# Altium PCB HeatingAC_Garage.PcbDoc
Units mil, origin at the board's own origin, x right, y up, seen from the top; angles counter-clockwise.
Board outline 6000 x 6000 mil, 4 copper layers (Top Layer, Internal Plane 1, Internal Plane 2, Bottom Layer); 61 components, 55 nets, 190 pads, 20 vias.
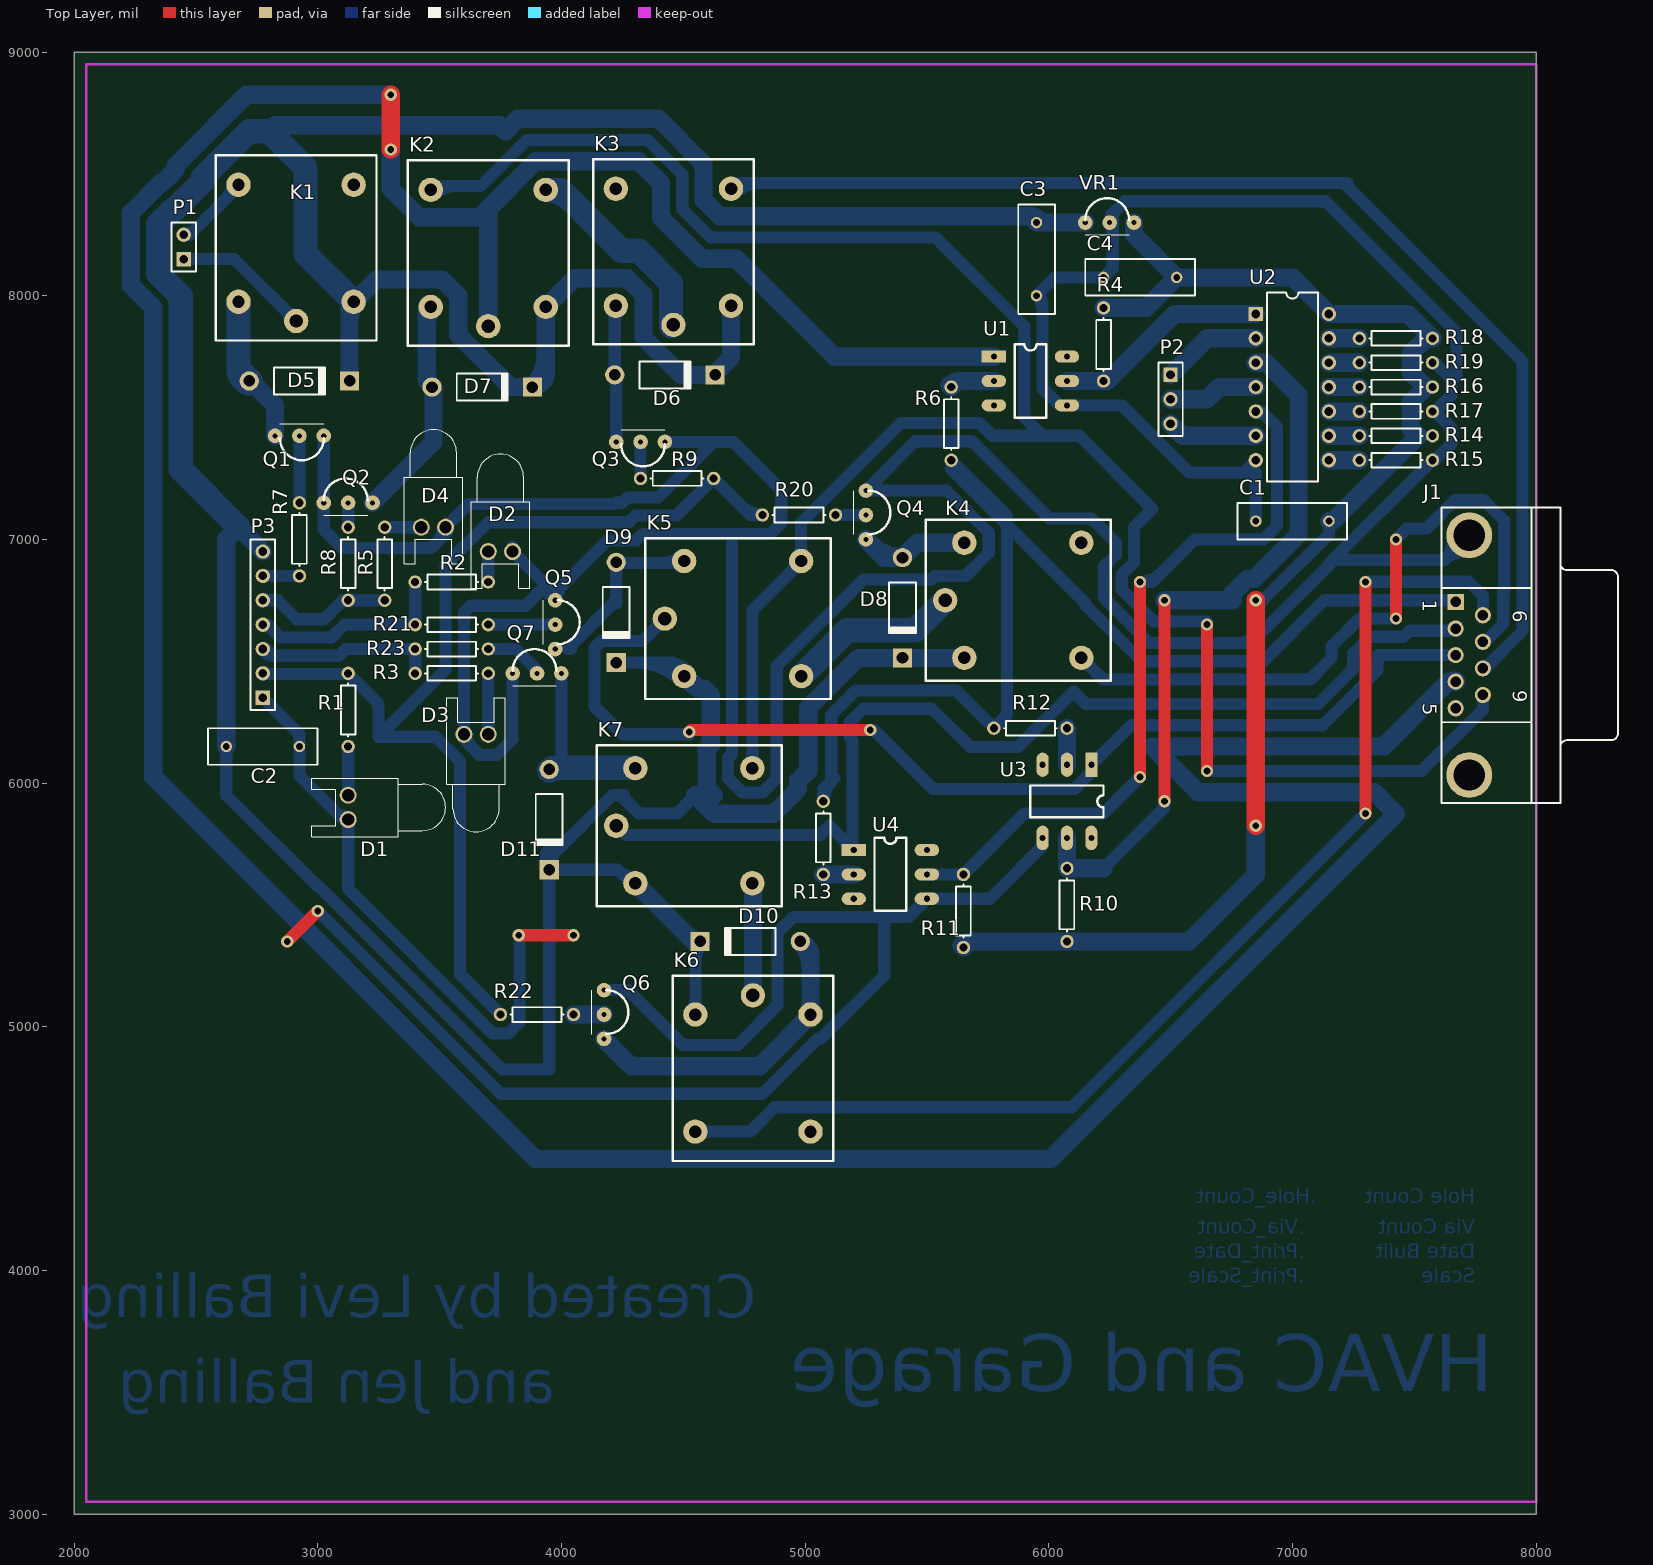
[diagram p0: Top Layer view]
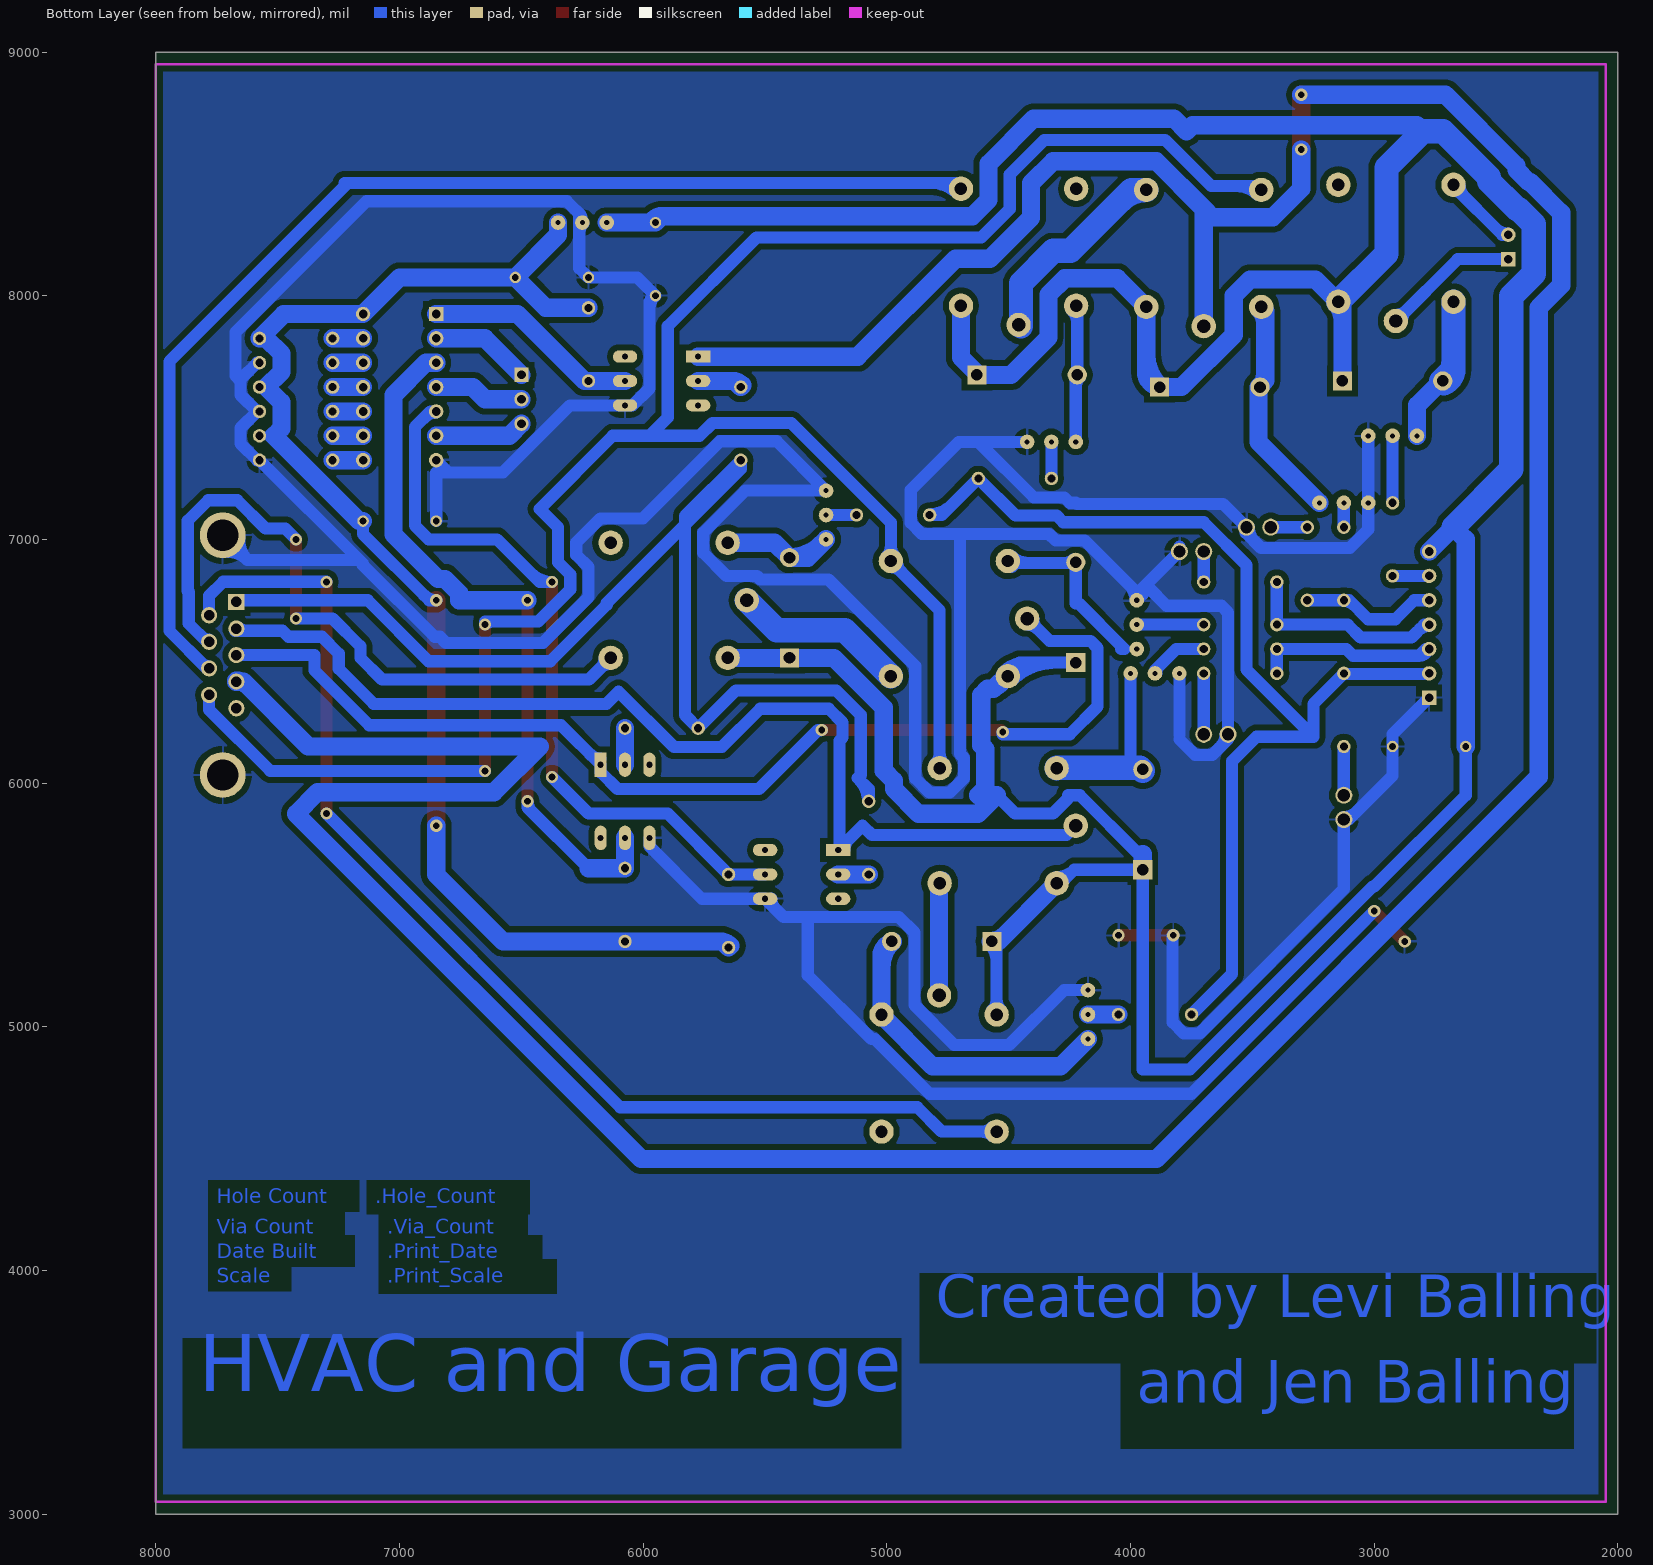
[diagram p1: Bottom Layer view, seen from below]
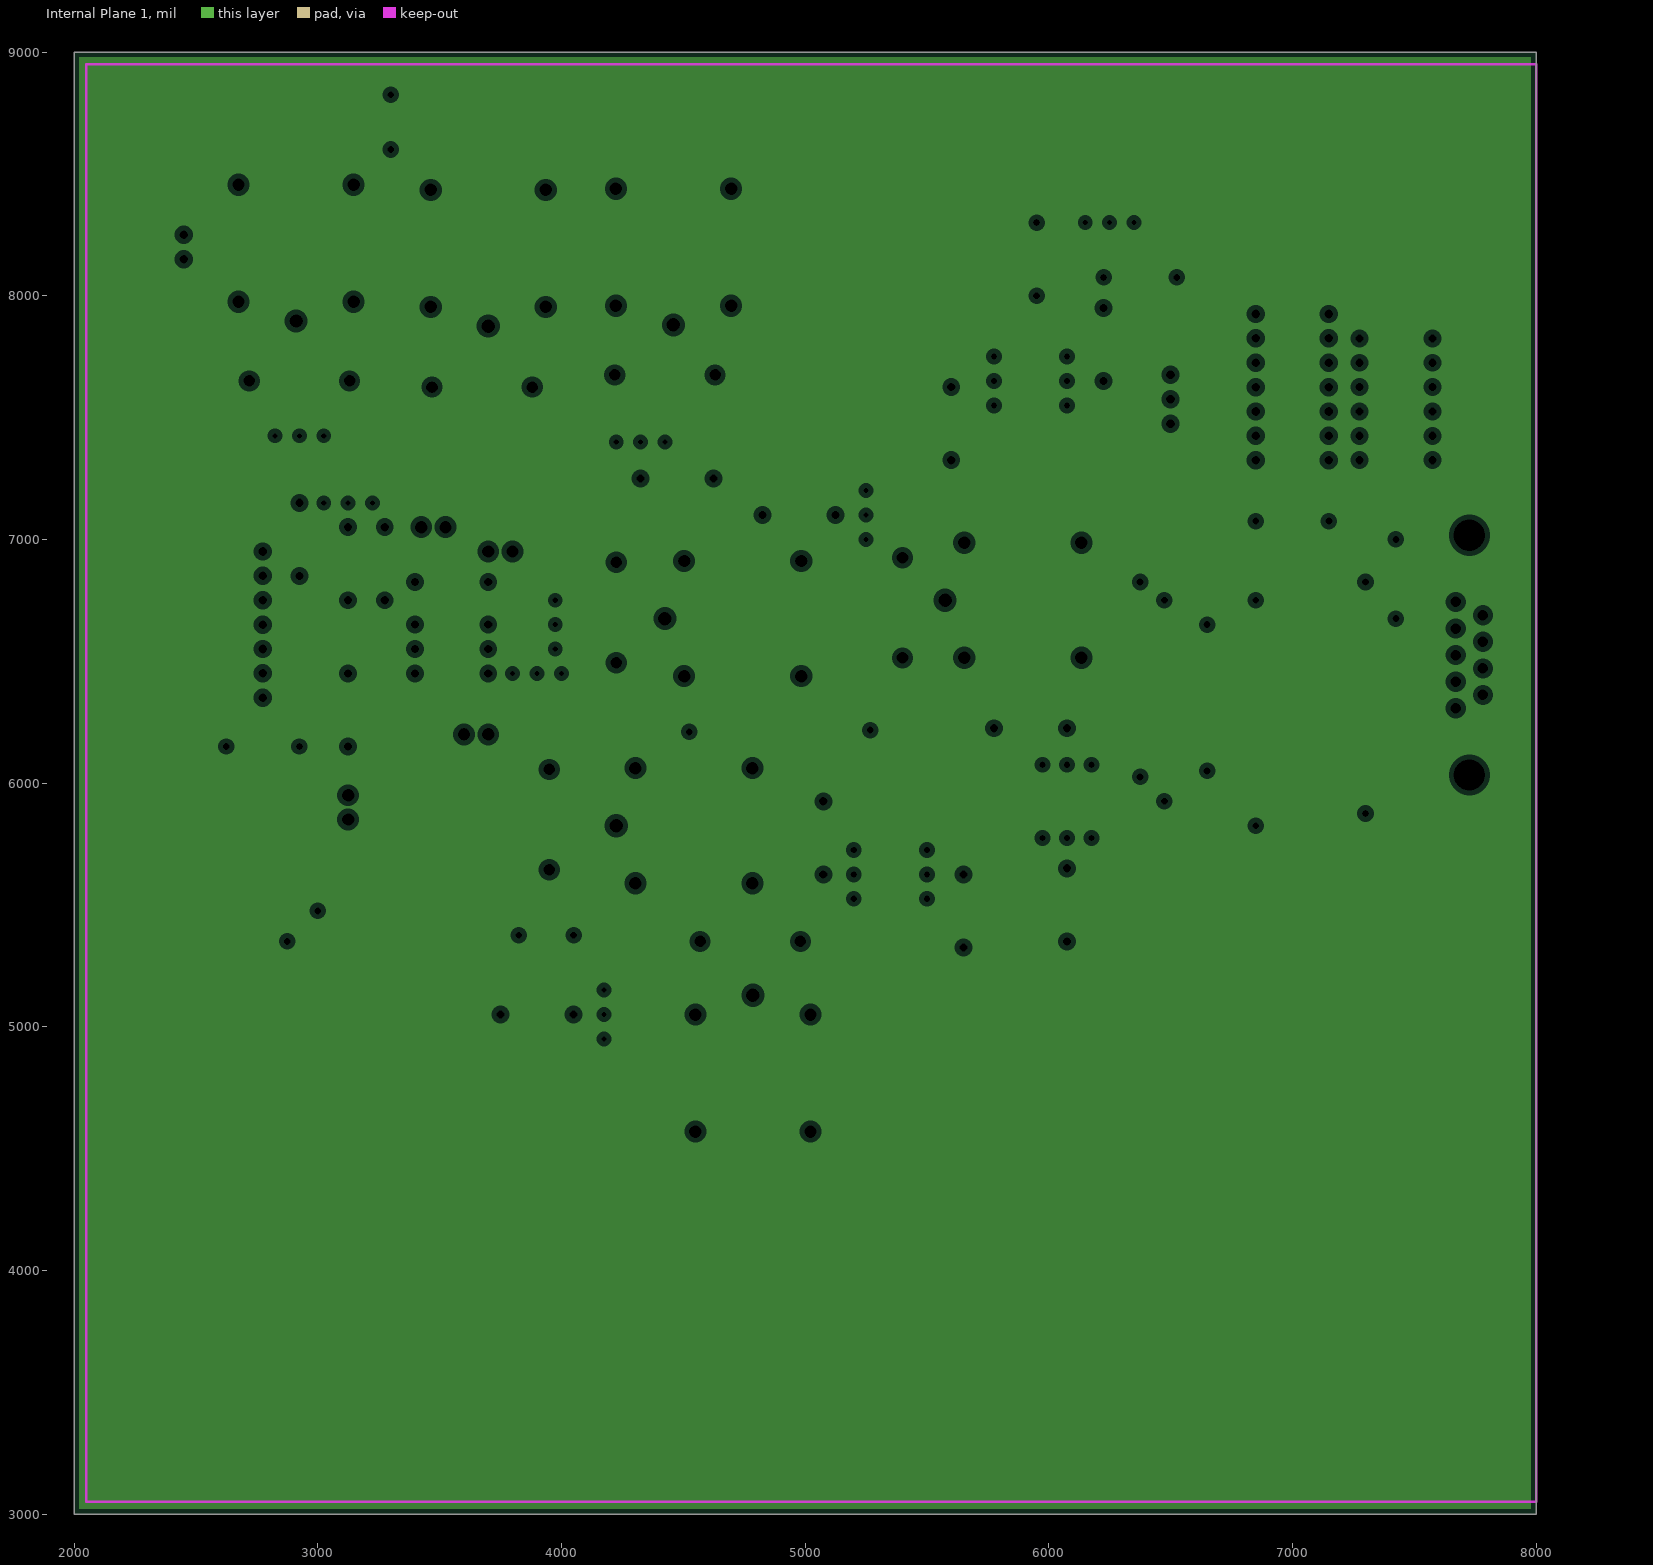
[diagram p2: Internal Plane 1, clearances drawn from the general rule]
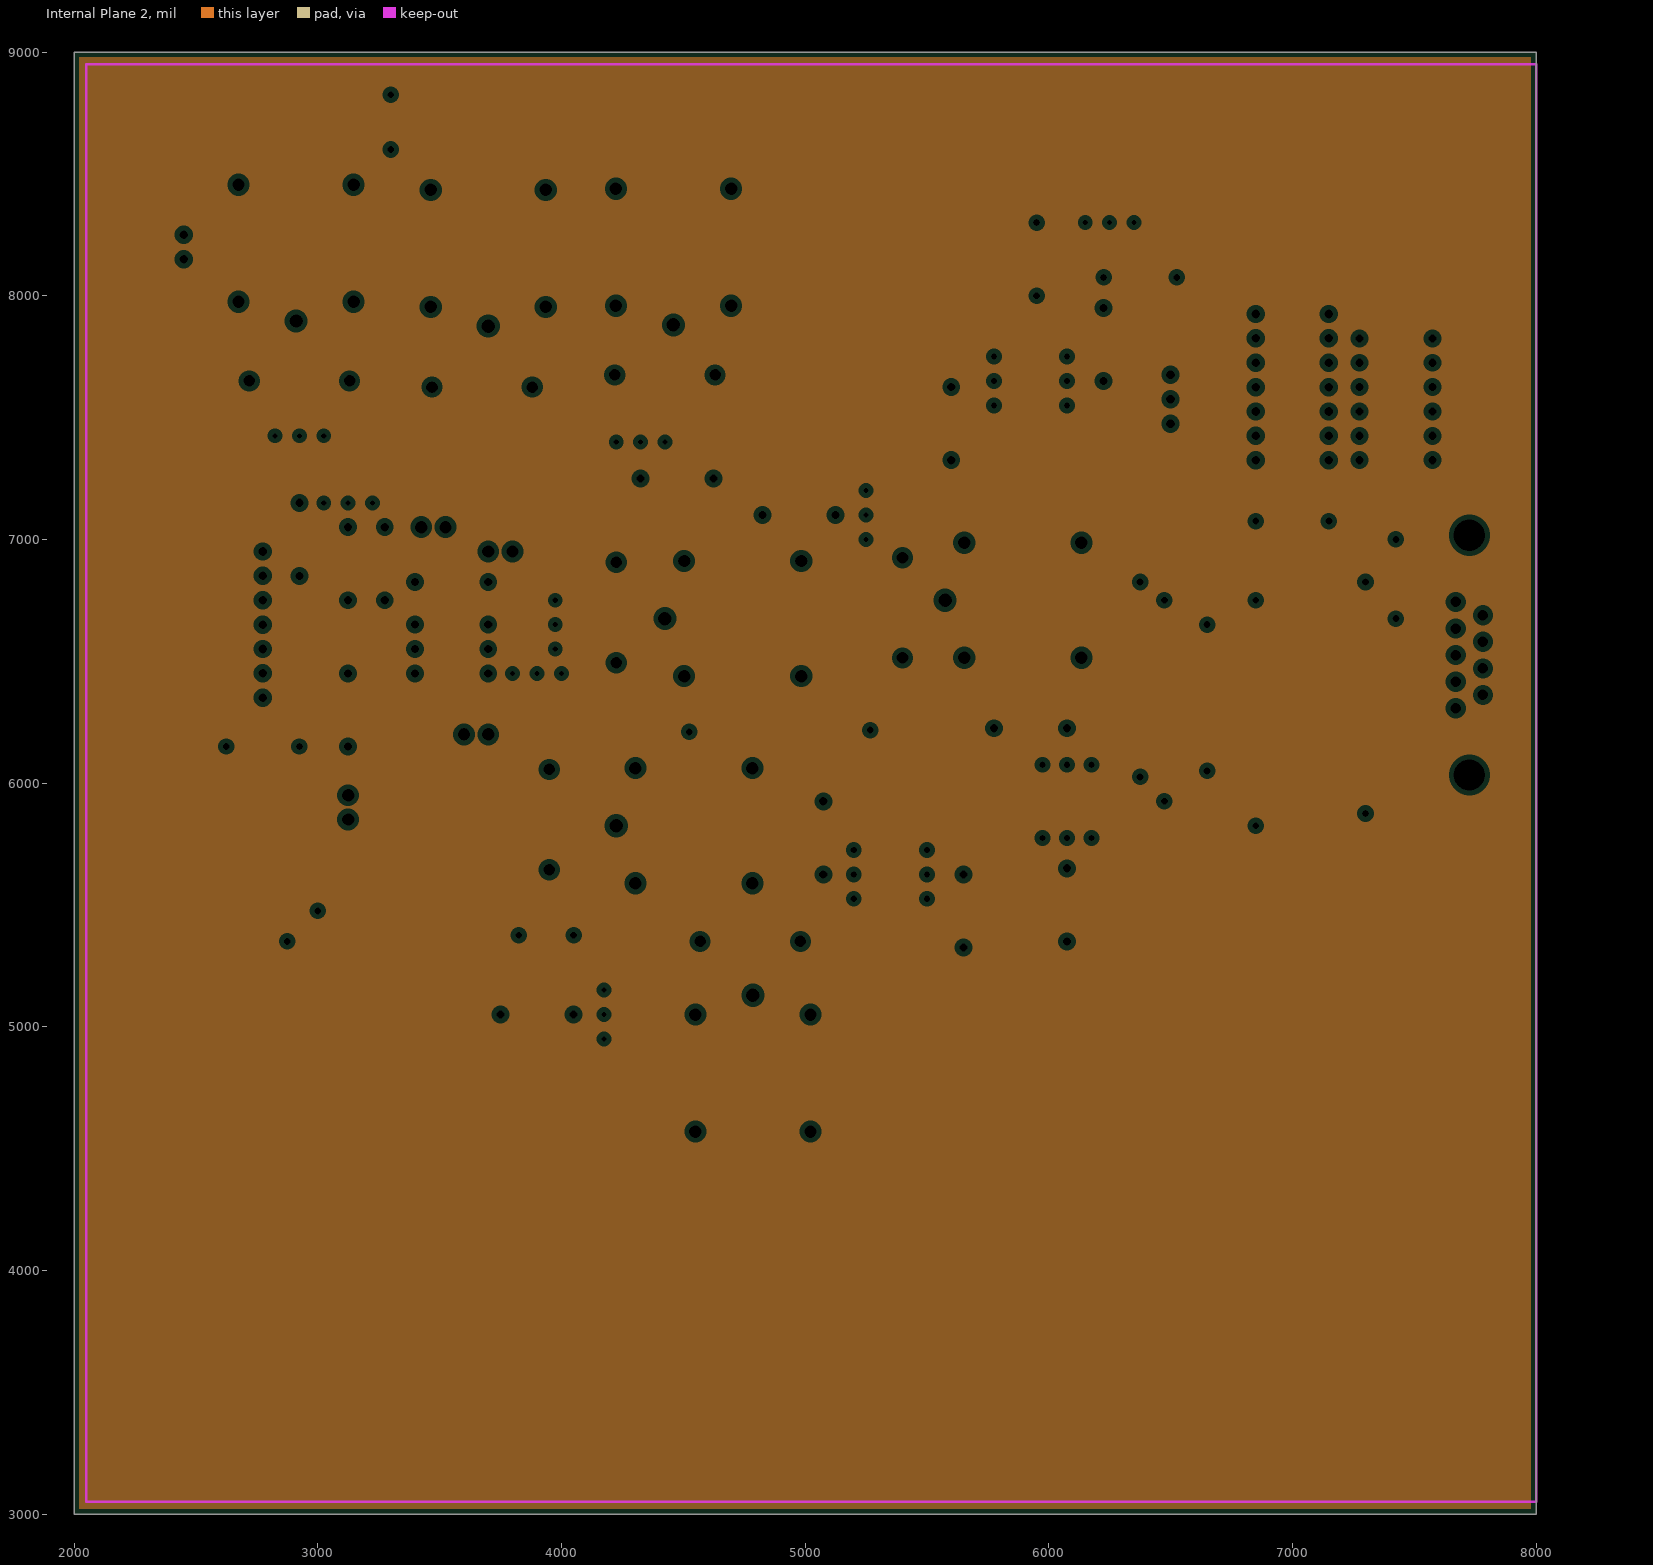
[diagram p3: Internal Plane 2, clearances drawn from the general rule]

## Layer stack, top to bottom
Top Layer: signal copper 1.4
Dielectric: dielectric 12.6, FR-4, Dk 4.8
Internal Plane 1: plane copper 1.4
Dielectric: dielectric 12.6, FR-4, Dk 4.8
Internal Plane 2: plane copper 1.4
Dielectric: dielectric 12.6, FR-4, Dk 4.8
Bottom Layer: signal copper 1.4

## Board outline
2000,3000 8000,3000 8000,9000 2000,9000

## Design rules (kind name [scope] priority, off if disabled: settings)
Clearance [All] p1: gap=25
PlaneClearance [All] p1: clearance=20
PlaneConnect [All] p1: planeconnectstyle=Relief reliefexpansion=20 reliefentries=4 reliefconductorwidth=10 reliefairgap=10
PolygonConnect [All] p1: connectstyle=Relief reliefconductorwidth=10 reliefentries=4 polygonreliefangle="90 Angle"
RoomDefinition HeatingAC_Garage [InComponentClass('HeatingAC_Garage')] p1: confinementstyle=ConfineIn formatcopy=TRUE lockcomponents=FALSE outline 2025,3050 8000,3050 8000,8950 2025,8950
RoutingVias [All] p1: holewidth=32 width=62 viastyle="Through Hole" minholewidth=28 minwidth=50 maxholewidth=28 maxwidth=50
SilkscreenOverComponentPads [All] p1: minsilkscreentomaskgap=10
SolderMaskExpansion [All] p1: expansion=4
Width [All] p1: maxlimit=100 minlimit=5 preferedwidth=25 bottomlayer_minwidth=25 minimp=50.000000 maximp=50.000000 favimp=50.000000
25 further rules are at their usual default settings.

## Classes and differential pairs
component class HeatingAC_Garage: *1 *2 *3 C1 C2 C3 C4 D1 D2 D3 D4 D5 D6 D7 D8 D9 D10 D11 J1 K1 K2 K3 K4 K5 K6 K7 P1 P2 P3 Q1 Q2 Q3 Q4 Q6 R1 R2 R3 R5 R8 R9 R11 R12 R14 R15 R16 R17 R20 R21 R22 R23 U1 U2 U3 U4 VR1

## Components (designator, comment, footprint, x,y, rotation, side; value= is the part's Value field where it differs from the comment)
C1 "Cap" RAD-0.3 7000,7075 r0 top
C2 "Cap" RAD-0.3 2775,6150 r180 top
C3 "Cap" RAD-0.3 5950,8150 r90 top
C4 "Cap" RAD-0.3 6375,8075 r0 top
D1 "LED_White" LED-0 3125,5900 r90 top
D2 "LED_White" LED-0 3750,6950 r180 top
D3 "LED_White" LED-0 3650,6200 r0 top
D4 "LED_White" LED-0 3475,7050 r180 top
D5 "1N4001" DO-41 2925,7650 r0 top
D6 "1N4001" DO-41 4425,7675 r0 top
D7 "1N4001" DO-41 3675,7625 r0 top
D8 "1N4001" DO-41 5400,6719.09 r270 top
D9 "1N4001" DO-41 4225,6700 r270 top
D10 "1N4001" DO-41 4775,5350 r180 top
D11 "1N4001" DO-41 3950,5850 r270 top
J1 "D Connector 9" DSUB1.385-2H9 8100,6525 r270 top
K1 "SPDT" "Relay  SPDT Tayda" 2911.22,7896.26 r180 top
K2 "SPDT" "Relay  SPDT Tayda" 3700,7875 r180 top
K3 "SPDT" "Relay  SPDT Tayda" 4460,7880 r180 top
K4 "SPDT" "Relay  SPDT Tayda" 5575,6750 r90 top
K5 "SPDT" "Relay  SPDT Tayda" 4425,6675 r90 top
K6 "SPDT" "Relay  SPDT Tayda" 4786.22,5128.74 r0 top
K7 "SPDT" "Relay  SPDT Tayda" 4225,5825 r90 top
P1 "Header 2" HDR1X2 2450,8150 r90 top
P2 "Header 3" HDR1X3 6500,7675 r270 top
P3 "Header 7" HDR1X7 2775,6350 r90 top
Q1 "2N3904" 2N3904 3025,7425 r180 top
Q2 "2N3904" 2N3904 3025,7150 r0 top
Q3 "2N3904" 2N3904 4425,7400 r180 top
Q4 "2N3904" 2N3904 5250,7200 r270 top
Q5 "2N3904" 2N3904 3975,6750 r270 top
Q6 "2N3904" 2N3904 4175,5150 r270 top
Q7 "2N3904" 2N3904 3800,6450 r0 top
R1 "Res1" AXIAL-0.3 3125,6300 r270 top
R2 "Res1" AXIAL-0.3 3550,6825 r0 top
R3 "Res1" AXIAL-0.3 3550,6450 r0 top
R4 "Res1" AXIAL-0.3 6225,7800 r90 top
R5 "Res1" AXIAL-0.3 3275,6900 r90 top
R6 "Res1" AXIAL-0.3 5600,7475 r90 top
R7 "Res1" AXIAL-0.3 2925,7000 r90 top
R8 "Res1" AXIAL-0.3 3125,6900 r90 top
R9 "Res1" AXIAL-0.3 4475,7250 r180 top
R10 "Res1" AXIAL-0.3 6075,5500 r270 top
R11 "Res1" AXIAL-0.3 5650,5475 r270 top
R12 "Res1" AXIAL-0.3 5925,6225 r0 top
R13 "Res1" AXIAL-0.3 5075,5775 r270 top
R14 "Res1" AXIAL-0.3 7425,7425 r180 top
R15 "Res1" AXIAL-0.3 7425,7325 r0 top
R16 "Res1" AXIAL-0.3 7425,7625 r180 top
R17 "Res1" AXIAL-0.3 7425,7525 r0 top
R18 "Res1" AXIAL-0.3 7425,7825 r180 top
R19 "Res1" AXIAL-0.3 7425,7725 r0 top
R20 "Res1" AXIAL-0.3 4975,7100 r0 top
R21 "Res1" AXIAL-0.3 3550,6650 r0 top
R22 "Res1" AXIAL-0.3 3900,5050 r0 top
R23 "Res1" AXIAL-0.3 3550,6550 r0 top
U1 "OptoCoupler" Octocoupler 5775,7750 r0 top
U2 "SN7416N" N014 7000,7625 r270 top
U3 "OptoCoupler" Octocoupler 6175,6075 r270 top
U4 "OptoCoupler" Octocoupler 5200,5725 r0 top
VR1 "L78L05ACZ" 2N3904 6150,8300 r0 top

## Footprints (in the part's own frame and the unit in brackets; to place one, negate y for a bottom-side part, rotate by r counter-clockwise, add the part's x,y. Pads: shape width x height; smd on the part's side, far side on the other; paste and mask are expansions set on the pad)
2N3904 [mil] "simple transistor, but bigger holes and pads"
  round 60 hole 21: 1(0,0) 2(100,0) 3(200,0)
  silkscreen extent 0,-50 180,100
AXIAL-0.3 [mm] "Axial Device, Thru-Hole; 2 Leads; 0.3 in Pin Spacing"
  round 1.4 hole 0.85: 1(-3.81,0) 2(3.81,0)
  silkscreen extent -2.77,-0.76 2.77,0.76
DO-41 [mm] "Diode, Axial; Body 5.2 x 2.7 mm (LxDia. max), Lead Dia. 0.86 mm (max)"
  round 2 hole 1.2: 1(-5.23,0)
  rect 2x2 hole 1.2: 2(5.23,0)
  silkscreen extent -2.65,-1.4 2.75,1.4
DSUB1.385-2H9 [mm] "Connector; D Subminiature; 9 Position; Right Angle; Pitch 1.385 mm"
  rect 1.69x1.69 hole 1.09: 1(-5.54,-10.92)
  round 1.69 hole 1.09: 2(-2.77,-10.92) 3(0,-10.92) 4(2.77,-10.92) 5(5.54,-10.92) 6(-4.155,-8.08) 7(-1.385,-8.08) 8(1.385,-8.08) 9(4.155,-8.08)
  round 4.76 hole 3.26: 10(-12.495,-9.5) 11(12.495,-9.5)
  silkscreen extent -15.4,-12.4 15.4,6
HDR1X2 [mm] "Connector; Header; 2 Position"
  rect 1.5x1.5 hole 0.9: 1(0,0)
  round 1.5 hole 0.9: 2(2.54,0)
  silkscreen extent -1.27,-1.27 3.81,1.27
HDR1X3 [mm] "Connector; Header; 3 Position"
  rect 1.5x1.5 hole 0.9: 1(0,0)
  round 1.5 hole 0.9: 2(2.54,0) 3(5.08,0)
  silkscreen extent -1.27,-1.27 6.35,1.27
HDR1X7 [mm] "Connector; Header; 7 Position"
  rect 1.5x1.5 hole 0.9: 1(0,0)
  round 1.5 hole 0.9: 2(2.54,0) 3(5.08,0) 4(7.62,0) 5(10.16,0) 6(12.7,0) 7(15.24,0)
  silkscreen extent -1.27,-1.27 16.51,1.27
LED-0 [mil] "LED; 2 Leads"
  round 70 hole 50: 1(50,0) 2(-50,0)
  silkscreen extent -120,-400 120,150
N014 [mm] "DIP; 14 Leads; Row Spacing 7.62 mm; Pitch 2.54 mm"
  rect 1.5x1.5 hole 0.9: 1(-7.62,-3.81)
  round 1.5 hole 0.9: 2(-5.08,-3.81) 3(-2.54,-3.81) 4(0,-3.81) 5(2.54,-3.81) 6(5.08,-3.81) 7(7.62,-3.81) 8(7.62,3.81) 9(5.08,3.81) 10(2.54,3.81) 11(0,3.81) 12(-2.54,3.81) 13(-5.08,3.81) 14(-7.62,3.81)
  silkscreen extent -9.85,-2.65 9.85,2.65
Octocoupler [mil]
  rect 100x50 hole 25: 1(0,0)
  oval 100x50 hole 25: 2(0,-100) 3(0,-200) 4(300,-200) 5(300,-100) 6(300,0)
  silkscreen extent 85,-250 215,50
RAD-0.3 [mm] "Radial Cap, Thru-Hole; 2 Leads; 0.3 in Pin Spacing"
  round 1.2 hole 0.7: 1(-3.81,0) 2(3.81,0)
  silkscreen extent -5.71,-1.91 5.71,1.91
"Relay  SPDT Tayda" [mm] "this is the ATTC-3372"
  round 2.54 hole 1.4: 0(0,0)
  round 2.54 hole 1.3: 1(6,-2) 2(-6,-2) 3(6,-14.2) 4(-6,-14.2)
  silkscreen extent -8.38,-17.27 8.38,2.03

## Part data
C1 C2 C3 C4: "Capacitor"
D1 D2 D3 D4: library part LED0, "Typical INFRARED GaAs LED"
D5 D6 D7 D8 D9 D10 D11: "1.0 Ampere General Purpose Rectifier"
J1: "Receptacle Assembly, 9 Position, Right Angle"
P1: "Header, 2-Pin"
P2: "Header, 3-Pin"
P3: "Header, 7-Pin"
Q1 Q2 Q3 Q4 Q5 Q6 Q7: "NPN General Purpose Amplifier"
R1 R2 R3 R4 R5 R6 R7 R8 R9 R10 R11 R12 R13 R14 R15 R16 R17 R18 R19 R20 R21 R22 R23: "Resistor"
U2: "Hex Inverter Buffer / Driver with High-Voltage Outputs"
VR1: library part "Volt Reg", "Voltage Regulator"

## Via types
v1: diameter 50, hole 28, Top Layer to Bottom Layer, 20 vias

## Nets (pads, with @x,y where several pads share a name; then routed paths per layer and width w, separated by ;. In a path a pad name is that pad's centre, name@x,y a point inside that pad or via, vN(x,y) a via of type N, cw(c..) or ccw(c..) an arc to the next point about the centre after c; other vN are vias at no path point)
24VAC_GND: J1.1 R6.1 R12.1 R13.1 | length 5120.8
  Bottom Layer w50: R13.1 5075,5975 5120.13,6020.13 5107.63,6032.63 5107.63,6279.51 5207.99,6379.87 5620.13,6379.87 R12.1 5828.74,6278.74 5828.74,7096.26 R6.1 5600,7289.12 6150,6739.12 6150,6731.8 6381.8,6500 6881.07,6500 7131.07,6750 J1.1@7675,6750 ; R13.1@5077.56,5925 cw(c5204.45,5925) 5114.72,6014.72 ; R6.1@5602.56,7325 ccw(c5695.35,7325) 5629.74,7259.39 ; 7633.49,6750 cw(c7633.49,6706.52) J1.1@7664.23,6737.26
+VCC5: C1.2 C4.2 R4.2 R10.2 R11.2 R14.1 R16.1 R18.1 U2.14 VR1.3 | length 5850.1
  Top Layer w75: v1(6850,5825) v1(6850,6750)
  Bottom Layer w50: 6898.74,6770.19 cw(c6850,6818.93) v1(6850,6750) 6878.55,6750 7150,7021.45 C1.2
  Bottom Layer w75: R11.2@5642.97,5332.03 cw(c5686.36,5288.64) 5686.36,5350 ; R11.2 5675,5350 R10.2 6575,5350 6850,5625 v1(6850,5825) ; R4.2 6400,7950 C4.2 ; VR1.3 6350,8250 C4.2 ; C1.2 7166.42,7075 7516.42,7425 7484.94,7456.48 7484.94,7562.3 7547.64,7625 7484.94,7687.7 7484.94,7762.3 7547.64,7825 R18.1 7475,7925 U2.14 7000,8075 C4.2
+VCC12: C2.2 C3.2 D5.2 D6.2 D7.2 D8.2 D9.2 D10.2 D11.2 K1.2 K2.2 K3.2 K4.2 K5.2 K6.2 K7.2 P3.7 VR1.1 | length 18883.3
  Bottom Layer w50: C2.2 2625,5950 3000,5575 3006.07,5575 3756.07,4825 3950,4825 D11.2 4230.91,5644.09 K7.2@4300,5575 ; 3950,5709.1 3967.68,5709.1 4208.58,5950 4255.86,5950 ; D9.2 4455.91,6494.09 ; 4231.15,5643.85 ccw(c4303.74,5716.43) K7.2@4303.74,5613.78 ; 4257.14,5948.72 4257.14,5936.79 4318.93,5875 4475,5875 4548.72,5948.72 ; 4309.84,6494.09 cw(c4309.84,6244.88) K5.2@4486.06,6421.1 ; 4430.55,6494.09 cw(c4430.55,6365.59) K5.2@4521.42,6456.46 ; K5.2@4478.74,6438.83 ccw(c4400.79,6438.97) 4455.91,6494.09 ; K5.2@4500,6450 4455.91,6494.09 ; K6.2@4532.32,5067.68 ccw(c4489.64,5110.36) 4550,5110.36 ccw(c4610.36,5110.36) K6.2@4567.68,5067.68 ; K6.2 D10.2@4550,5325 ; 4550,5269.21 cw(c4649.89,5269.21) D10.2@4579.26,5339.84
  Bottom Layer w75: C2.2 2625,7000 2675,7050 P3.7 ; 2800,8675 2825,8700 3745.58,8700 3770.58,8675 3822.13,8726.56 4398.44,8726.56 4583.72,8541.28 4583.72,8392.46 4649.62,8326.56 5923.44,8326.56 ; D5.2 3130.91,7955.91 3241.24,8066.24 3510.38,8066.24 3576.28,8000.34 3576.28,7839.62 3790.9,7625 D7.2@3875,7625 ; 3130.91,7904.9 cw(c3217.54,7904.9) K1.2@3156.28,7966.16 ; D7.2@3879.58,7626.32 ccw(c3742.85,7763.06) 3936.22,7763.06 ; D7.2@3880.78,7626.87 ccw(c3876.73,7686.22) 3936.22,7686.22 ; D7.2 D7.2@3875,7625 ; D11.2 3950,5709.1 ; K7.2 4542.52,5350 D10.2 D10.2@4575,5350 ; K5.2@4500,6450 4562.5,6387.5 4586.24,6387.5 ; K5.2@4515.84,6441.93 ccw(c4586.24,6460.25) 4586.24,6387.5 ; 4520.54,5371.98 ccw(c4569.09,5420.54) D10.2@4569.09,5351.87 ; 4548.72,5948.72 4550,5950 4626.28,5873.72 4869.9,5873.72 4971.56,5975.37 4971.56,6009.03 5012.97,6050.44 5012.97,6308.59 5217.56,6513.19 D8.2 5638.19,6513.19 K4.2@5650,6525 ; 4625,5950 4596.56,5978.44 4596.56,6138.89 4612.5,6154.83 4612.5,6361.24 4586.24,6387.5 ; K3.2 4696.22,7746.22 4625,7675 4490.9,7675 4337.5,7828.4 4337.5,8004.12 4270.38,8071.24 4053.72,8071.24 K2.2 3936.22,7686.22 ; 5919.39,8326.56 cw(c5919.39,8269.39) C3.2@5959.81,8309.81 ; C3.2@5960.79,8308.73 ccw(c5923.45,8278.53) 5923.45,8326.56 ; VR1.1 C3.2 5923.44,8326.56 ; D7.2@3875,7625 3936.22,7686.22
  Bottom Layer w100: 2675,7050 2437.5,7287.5 2437.5,7997.38 2345.47,8089.41 2345.47,8293.3 2406.7,8354.53 2413.63,8354.53 2529.28,8470.18 2529.28,8486.37 2717.91,8675 2800,8675 2950,8525 2950,8172.44 K1.2
AC_G_LINE_IN: J1.4 K2.0 U1.1 | length 16384.6
  Top Layer w75: v1(3300,8600) v1(3300,8825)
  Bottom Layer w75: v1(3300,8600) 3300,8438.74 3417.18,8321.56 3664.62,8321.56 3700,8356.93 ; v1(3300,8825) 2708.81,8825 2416.78,8532.97 2416.78,8516.78 2367.03,8467.03 2360.1,8467.03 2232.97,8339.9 2232.97,8042.81 2325,7950.78 2325,6026.26 3894.07,4457.19 6008.44,4457.19 7425,5873.74 7336.24,5962.5 6612.5,5962.5 6425,6150 7375,6150 7640.94,6415.94 J1.4 ; K2.0 3700,8356.93 ; U1.1 5120.11,7750 4718.56,8151.56 4577.13,8151.56 4408.72,8319.97 4408.72,8461.39 4318.56,8551.56 3894.62,8551.56 3700,8356.93 ; 7627.57,6402.57 cw(c7670.08,6360.06) J1.4@7670.08,6420.18
AC_G_LINE_OUT: J1.8 K3.4 | length 5043.9
  Bottom Layer w50: K3.4 4719.67,8462.5 7225,8462.5 7225,8450 7945,7730 7945,6624.88 7790.59,6470.47 J1.8 ; K3.4@4713.9,8421.38 cw(c4813.18,8322.1) 4813.18,8462.5 ; J1.8@7781.89,6478.74 ccw(c7781.89,6519.71) 7810.86,6490.74
AC_W_LINE_IN: J1.3 K5.0 U3.1 | length 4749.2
  Top Layer w50: v1(4525,6209.75) 4532.63,6217.37 v1(5267.37,6217.37)
  Bottom Layer w50: K5.0@4400,6675 cw(c4339.64,6675) 4382.32,6632.32 cw(c4425,6589.64) K5.0@4425,6650 ; K5.0 4333.46,6583.46 4164.92,6583.46 4135.63,6554.18 4135.63,6314.37 4250,6200 v1@4525,6200 ; 4501.46,6200 ccw(c4501.46,6233.29) v1(4525,6209.75) ; 5293.41,6206.59 ccw(c5267.37,6180.56) v1(5267.37,6217.37) 5282.63,6217.37 5525,5975 6106.07,5975 6175,6043.93 U3.1 6337.5,6237.5 7124.63,6237.5 7350,6462.87 7350,6525 J1.3@7675,6525 ; U3.1@6175,6100 ccw(c6175,6160.36) 6217.68,6117.68
AC_W_LINE_OUT: J1.7 K4.4 | length 2995.5
  Top Layer w50: v1(7425,6675) v1(7425,7000)
  Bottom Layer w50: K4.4@6134.06,6488.78 cw(c6134.06,6428.42) 6176.73,6471.1 cw(c6219.41,6513.78) K4.4@6159.06,6513.78 ; K4.4 6222.83,6425 7072.44,6425 7161.22,6513.78 7161.22,6561.22 7275,6675 v1(7425,6675) ; v1(7425,7000) 7469.17,7044.17 7550,7044.17 7666.46,7160.63 7785.51,7160.63 7869.69,7076.45 7869.69,6788.35 7865.16,6783.82 7865.16,6654.09 7790.59,6579.53 J1.7 ; J1.7@7781.89,6587.8 ccw(c7781.89,6628.77) 7810.86,6599.8
AC_Y_LINE_IN: J1.2 K7.0 U4.1 | length 4523.1
  Bottom Layer w50: K7.0 4263.78,5786.22 5061.22,5786.22 5100,5825 U4.1 5195.13,5729.87 5195.13,6173.81 5182.63,6186.31 5182.63,6248.44 5239.06,6304.87 5520.13,6304.87 5677.56,6147.44 5873.7,6147.44 6101.26,6375 6151.26,6325 7106.07,6325 7250,6468.93 7250,6531.07 7318.93,6600 7456.07,6600 7481.07,6625 J1.2@7675,6625 ; 5157.32,5767.68 cw(c5114.64,5725) U4.1@5175,5725 ; 7628.26,6625 ccw(c7628.26,6675.88) J1.2@7664.23,6639.9
AC_Y_LINE_OUT: J1.6 K6.4 | length 4921.3
  Top Layer w50: v1(7300,5875) v1(7300,6825)
  Bottom Layer w50: K6.4 4775.75,4569.69 4875.75,4669.69 6094.69,4669.69 v1(7300,5875) ; K6.4@4567.68,4552.01 cw(c4610.36,4509.33) 4610.36,4569.69 cw(c4610.36,4630.04) K6.4@4567.68,4587.36 ; v1@7300,6826.38 7724.06,6826.38 7781.89,6768.55 J1.6
G_TRIGGER: P2.1 U2.2 | length 412.1
  Bottom Layer w75: P2.1 6650,7825 U2.2
GARAGE_LINE_IN: K1.0 P1.1 | length 661.1
  Bottom Layer w50: P1.1 2657.48,8150 K1.0 ; K1.0@2886.22,7896.26 ccw(c2825.87,7896.26) 2868.54,7938.94 ccw(c2911.22,7981.62) K1.0@2911.22,7921.26
GARAGE_LINE_OUT: K1.3 P1.2 | length 458.6
  Bottom Layer w50: P1.2 2475,8250 K1.3@2675,8450 ; P1.2@2450,8254.53 ccw(c2450,8325.81) 2500.41,8275.41 ; 2628.56,8403.56 ccw(c2576.81,8455.31) K1.3@2650,8455.31 ; 2641.4,8416.4 cw(c2675,8382.79) K1.3@2675,8430.31
GARAGE_SWITCH: P3.6 R7.1 | length 150
  Bottom Layer w50: P3.6 R7.1
GND: C1.1 C2.1 C3.1 C4.1 D1.2 D2.2 D3.2 D4.2 J1.10 J1.11 P3.1 Q1.1 Q2.1 Q3.1 Q4.1 Q5.1 Q6.1 Q7.1 R15.2 R17.2 R19.2 U1.4 U2.7 U3.4 U4.4 VR1.2 | length 26636.7
  Top Layer w50: v1(2875,5350) v1(3000,5475) ; v1(3825,5375) v1(4050,5375)
  Bottom Layer w50: P3.1 2925,6200 C2.1 2925,6029.79 3104.79,5850 D1.2 3125,5565.31 3717.87,4972.44 3782.13,4972.44 3827.56,5017.87 3827.56,5375 v1(3825,5375) ; v1(3000,5475) 3750,4725 4825,4725 5050,4950 5063.86,4950 5325,5211.14 5325,5450 ; Q1.1 Q2.1 3025,7040.31 3100.31,6965 3465,6965 D4.2@3527.5,7027.5 ; 3073.43,5881.36 ccw(c3125,5932.93) D1.2@3125,5860 ; 3490.25,6990.25 ccw(c3430.5,7050) D4.2@3515,7050 ; D4.2 3620.28,7145.28 4220.28,7145.28 ; D3.2@3610,6200 ccw(c3682.93,6200) 3631.36,6148.43 ; 3800,6179.79 3735.21,6115 3664.79,6115 3600,6179.79 D3.2 3600,6700 3627.56,6727.56 3852.56,6727.56 3925,6800 ; 3800,6197.44 Q7.1 ; D2.2@3800,6970.21 D2.2 3950,6800 ; Q5.1@3977.35,6754.41 cw(c4001.66,6800) 3950,6800 ; Q5.1@3980,6750 cw(c4070.04,6750) 4006.37,6813.66 ; Q6.1 4273.74,5150 4498.74,4925 4723.9,4925 4887.5,5088.6 4887.5,5386.24 4951.26,5450 5325,5450 ; 4225,7150 4250,7150 4272.44,7172.44 4397.44,7172.44 4625,7400 ; Q3.1 4625,7400 ; 5457.32,5482.32 ccw(c5414.64,5525) U4.4@5475,5525 ; C3.1@5950.53,8001.27 cw(c5935.35,7964.65) 5975,7964.65 ; C3.1@5950.97,8000.97 cw(c5892.97,7942.97) 5975,7942.97 ; U3.4 5975,5740.31 5759.69,5525 U4.4 5425,5450 5325,5450 ; VR1.2@6246.46,8296.46 cw(c6207.75,8257.75) 6262.5,8257.75 ; VR1.2@6246.89,8303.92 ccw(c6221.22,8336.24) 6262.5,8336.24 ; VR1.2@6254.71,8301.68 cw(c6285.94,8312.8) 6262.5,8336.24 ; VR1.2@6255,8300 cw(c6324.39,8300) 6275.32,8349.07 ; C1.1 6850,7275 6800,7275 ; U2.7 6800,7275 ; 7150,6900 7151.38,6901.38 ; R19.2 7584.69,7725 7652.56,7657.13 7652.56,7650 ; J1.10@7657.71,7009.29 cw(c7544.34,6996.61) 7625,6915.95 ; J1.10@7718.35,6948.65 ccw(c7705.67,6835.29) 7625,6915.95 ; J1.10 7625,6915.94 ; 3950,6800 3950,6775 Q5.1 3975,6782.29 4187.98,6995.28 4307.41,6995.28 4334.57,7022.44 4700,7022.44 ; 4625,7400 4705.12,7400 4902.56,7202.56 4902.56,7067.87 4857.13,7022.44 4700,7022.44 ; 4700,7022.44 4700,6118.59 4684.06,6102.64 4684.06,6019.8 4742.63,5961.22 4825.48,5961.22 4884.06,6019.8 4884.06,6480.2 5239.48,6835.63 5519.21,6835.63 5533.58,6850 5658.94,6850 5753.74,6944.8 5753.74,7027.64 5581.38,7200 Q4.1 5452.56,7402.56 5685.31,7402.56 6001.65,7086.22 6175.48,7086.22 6275,6986.7 6275,6937.13 6225,6887.13 6225,6762.87 6412.87,6575 6809.62,6575 6834.62,6600 6856.07,6600 7151.38,6895.31 7151.38,6901.38 ; 6262.5,8336.24 6262.5,8112.5 C4.1 6025,8075 C3.1 5975,7975 5975,7618.93 6043.93,7550 U1.4 6301.26,7550 6576.26,7275 6800,7275 ; 6262.5,8336.24 6313.76,8387.5 7136.24,8387.5 7673.74,7850 7673.74,7671.18 7652.56,7650 ; 7151.38,6901.38 7165.94,6915.94 ; 7165.94,6915.94 R15.2 7584.69,7325 7652.56,7392.87 7652.56,7457.13 7584.69,7525 7652.56,7592.87 7652.56,7650 ; 7165.94,6915.94 7625,6915.94
NetD1_1: D1.1 R1.2 | length 200
  Bottom Layer w50: D1.1 R1.2
NetD2_1: D2.1 R2.2 | length 125
  Bottom Layer w50: R2.2 D2.1
NetD3_1: D3.1 R3.2 | length 250
  Bottom Layer w50: D3.1 R3.2
NetD4_1: D4.1 R5.2 | length 150
  Bottom Layer w50: R5.2 D4.1
NetD5_1: D5.1 K1.1 Q1.3 | length 786.6
  Bottom Layer w75: D5.1@2725,7650 2825,7550 Q1.3
  Bottom Layer w100: 2675,7730.79 ccw(c2799.89,7730.79) D5.1@2711.58,7642.48 ; K1.1 2675,7700 ; D5.1@2715.04,7640.17 cw(c2739.71,7700) 2675,7700 ; D5.1@2725,7650 2675,7700
NetD6_1: D6.1 K3.1 Q3.3 | length 667.3
  Bottom Layer w50: D6.1@4208.93,7664.84 cw(c4170.14,7626.05) 4225,7626.05 ; D6.1 4219.09,7955.91 K3.1@4225,7950 ; 4219.09,7887.07 cw(c4295.45,7887.07) K3.1@4241.46,7941.06 ; Q3.3 D6.1@4225,7675
NetD7_1: D7.1 K2.1 Q2.3 | length 1056.9
  Bottom Layer w75: Q2.3 3475,7400 3475,7625 3447.07,7652.93 3447.07,7937.03 K2.1 ; 3447.07,7682.69 ccw(c3526.78,7682.69) D7.1@3470.42,7626.32 ; 3447.07,7883.22 cw(c3534.3,7883.22) K2.1@3472.62,7944.9
NetD8_1: D8.1 K4.1 Q4.3 | length 605.9
  Bottom Layer w75: Q4.3 5325,6925 D8.1 5461.22,6986.22 K4.1 ; Q4.3@5268.77,6981.23 ccw(c5400,7112.45) D8.1@5400,6926.87
NetD9_1: D9.1 K5.1 Q5.3 | length 849.7
  Bottom Layer w50: 4025,6550 4038.14,6550 4038.14,6562.75 4212.25,6736.86 4225,6736.86 D9.1@4225,6900 ; D9.1 4227.26,6903.65 4478.65,6903.65 K5.1@4500,6925 ; D9.1@4235.16,6916.07 ccw(c4265.15,6946.05) 4265.15,6903.65 ; 4425.1,6903.65 ccw(c4425.1,6989.86) K5.1@4486.06,6928.9
  Bottom Layer w75: K5.1@4492.52,6900 K5.1
NetD10_1: D10.1 K6.1 Q6.3 | length 1498.3
  Bottom Layer w75: Q6.3 4287.5,4837.5 4812.5,4837.5 K6.1@5025,5050 ; D10.1@4975,5350 5022.44,5302.56 K6.1 ; D10.1@4979.58,5348.68 cw(c4876.12,5245.21) 5022.44,5245.21 ; D10.1@4980.24,5348.25 cw(c4956.81,5286.95) 5022.44,5286.95
NetD11_1: D11.1 K7.1 Q7.3 | length 802.7
  Bottom Layer w50: D11.1@3950,6070.28 ccw(c3950,6119.23) 3984.61,6084.61 ; D11.1@3961.22,6061.22 4000,6100 Q7.3
  Bottom Layer w100: D11.1@3950,6050 3961.22,6061.22 3962.5,6062.5 4302.46,6062.5 K7.1
NetK2_4: K2.4 K3.0 | length 962.2
  Bottom Layer w100: 4038.76,8391.58 ccw(c3936.22,8289.05) K2.4 3996.28,8434.06 4246.6,8183.74 4316.98,8183.74 4450,8050.72 K3.0@4450,7875
NetK4_0: K4.0 K5.4 | length 719.9
  Bottom Layer w100: K5.4 5172.83,6627.56 5452.56,6627.56 K4.0
NetK6_0: K6.0 K7.4 | length 475.9
  Bottom Layer w75: K7.4@4775,5600 4786.22,5588.78 K6.0
NetQ1_2: Q1.2 R7.2 | length 275
  Bottom Layer w50: R7.2 Q1.2
NetQ2_2: Q2.2 R8.2 | length 100
  Bottom Layer w50: R8.2 Q2.2
NetQ3_2: Q3.2 R9.2 | length 150
  Bottom Layer w50: R9.2 Q3.2
NetQ4_2: Q4.2 R20.2 | length 125
  Bottom Layer w50: R20.2 Q4.2
NetQ5_2: Q5.2 R21.2 | length 275
  Bottom Layer w50: R21.2 Q5.2
NetQ6_2: Q6.2 R22.2 | length 125
  Bottom Layer w75: R22.2 Q6.2
NetQ7_2: Q7.2 R23.2 | length 283.5
  Bottom Layer w50: R23.2 3813.14,6550 3900,6463.14 Q7.2 ; 3882.18,6480.96 cw(c3851.21,6450) Q7.2@3895,6450
NetR4_1: R4.1 U1.5 U2.1 | length 888.9
  Bottom Layer w75: U1.5 R4.1 6241.42,7650 6516.42,7925 U2.1
NetR6_2: R6.2 U1.2 | length 233.5
  Bottom Layer w75: R6.2@5592.97,7632.03 cw(c5636.36,7588.64) 5636.36,7650 ; R6.2 5625,7650 U1.2
NetR10_1: R10.1 U2.3 U3.5 | length 3006.2
  Top Layer w50: v1(6475,5925) v1(6475,6750)
  Bottom Layer w50: 6225,5650 6475,5900 v1(6475,5925) cw(c6414.64,5925) 6457.32,5882.32
  Bottom Layer w75: U3.5 R10.1 6225,5650 ; v1(6475,6750) 6754.81,6750 6754.81,6778.55 6813.76,6837.5 6842.31,6837.5 7025,7020.19 7025,7591.42 6891.42,7725 U2.3
NetR11_1: R11.1 U2.5 U4.5 | length 3166.2
  Top Layer w50: v1(6375,6025) v1(6375,6825)
  Bottom Layer w50: U4.5 R11.1 5900,5875 6225,5875 v1(6375,6025) ; 6460.36,6860.36 cw(c6375,6945.71) v1(6375,6825) 6425,6825 6600,7000 6881.07,7000 6937.5,7056.43 6937.5,7461.24 6873.74,7525 U2.5 ; U2.5@6850,7520.47 cw(c6850,7452.22) 6898.26,7500.48
NetR12_2: R12.2 U3.2 | length 150
  Bottom Layer w75: U3.2 R12.2
NetR13_2: R13.2 U4.2 | length 125
  Bottom Layer w75: R13.2 U4.2
NetR14_2: R14.2 U2.9 | length 125
  Bottom Layer w75: U2.9 R14.2
NetR15_1: R15.1 U2.8 | length 125
  Bottom Layer w75: U2.8 R15.1
NetR16_2: R16.2 U2.11 | length 125
  Bottom Layer w75: U2.11 R16.2
NetR17_1: R17.1 U2.10 | length 125
  Bottom Layer w75: U2.10 R17.1
NetR18_2: R18.2 U2.13 | length 125
  Bottom Layer w75: U2.13 R18.2
NetR19_1: R19.1 U2.12 | length 125
  Bottom Layer w75: U2.12 R19.1
OFF_SWITCH: P3.2 R1.1 R9.1 R20.1 R22.1 | length 4575.3
  Bottom Layer w50: P3.2 2777.56,6447.44 3122.44,6447.44 R1.1 3250,6325 3250,6190.31 ; R22.1 3583.83,5216.17 3583.83,6089.9 3483.41,6190.31 3250,6190.31 ; 4735.28,7139.72 ccw(c4825,7229.45) R20.1@4825,7102.56 ; R20.1 4775,7100 R9.1 4472.44,7097.44 4303.51,7097.44 4276.34,7070.28 3700.07,7070.28 3525,6895.21 3525,6465.31 3250,6190.31
PD5_G_FAN_SWITCH: P3.5 R5.1 R8.1 | length 610.5
  Bottom Layer w50: P3.5 2836.2,6750 2913.76,6672.44 3025.62,6672.44 3103.18,6750 R8.1 R5.1 ; 3083.39,6730.2 cw(c3125,6688.59) R8.1@3125,6747.44
PD6_W_HEAT_SWITCH: P3.4 R2.1 R21.1 | length 890.4
  Bottom Layer w50: P3.4@2775,6645.47 cw(c2775,6585.8) 2817.2,6627.99 ; P3.4 2795.19,6650 2847.75,6597.44 3056.69,6597.44 3109.25,6650 R21.1 R2.1
PD7_Y_COOL_SWITCH: P3.3 R3.1 R23.1 | length 833.8
  Bottom Layer w50: P3.3@2775,6545.47 cw(c2775,6500.44) 2806.84,6532.28 ; P3.3 2789.12,6550 2816.68,6522.44 ; P3.3@2779.38,6551.16 ccw(c2816.68,6561.03) 2816.68,6522.44 ; R3.1 R23.1 3115.31,6550 3087.76,6522.44 2816.68,6522.44
VCC: 
VCC24AC: J1.9 K2.3 K5.3 K7.3 | length 9367.5
  Top Layer w50: v1(6650,6050) v1(6650,6650)
  Bottom Layer w50: K2.3@3450,8450 3669.32,8450 3858.38,8639.06 4354.8,8639.06 4496.22,8497.63 4496.22,8356.21 4613.38,8239.06 5535.94,8239.06 5900,7875 5900,7500 5975,7425 ; K2.3@3481.46,8416.38 cw(c3562.63,8335.21) 3562.63,8450 ; K7.3@4766.38,6078.9 ccw(c4723.7,6121.58) 4784.06,6121.58 ccw(c4844.41,6121.58) K7.3@4801.73,6078.9 ; K7.3 4784.06,6709.06 K5.3@5000,6925 ; 4939.85,6864.85 ccw(c4893.47,6911.22) K5.3@4959.06,6911.22 ; 4945.07,6870.07 cw(c4984.06,6831.09) K5.3@4984.06,6886.22 ; K5.3@4966.38,6928.9 ccw(c4923.7,6971.58) 4984.06,6971.58 ccw(c5044.41,6971.58) K5.3@5001.73,6928.9 ; K5.3 4984.06,7068.74 5392.87,7477.56 5716.37,7477.56 5768.93,7425 5975,7425 ; 6619.82,6662.5 cw(c6619.82,6619.82) v1(6650,6650) ; v1(6650,6050) 7530.95,6050 7781.89,6300.94 J1.9 ; v1@6650,6662.5 6431.43,6662.5 6300,6793.93 6300,6856.07 6350,6906.07 6350,7050 6425,7125 6125,7425 5975,7425
W_TRIGGER: P2.2 U2.4 | length 370.7
  Bottom Layer w75: P2.2 6650,7575 6700,7625 U2.4
Y_TRIGGER: P2.3 U2.6 | length 370.7
  Bottom Layer w75: P2.3 6550,7425 U2.6
pads on no net: J1.5 K1.4 K3.3 K4.3 K6.3 U1.3 U1.6 U3.3 U3.6 U4.3 U4.6

## Polygon pours and split planes (outlines as drawn)
GND on Bottom Layer "GndPlane" (solid, pour order 4): 8000,8950 8000,3050 2050,3050 2050,8950
no net on Internal Plane 1 (split plane): 7979.9,3020.1 2020.1,3020.1 2020.1,8979.9 7979.9,8979.9
no net on Internal Plane 2 (split plane): 7979.9,3020.1 2020.1,3020.1 2020.1,8979.9 7979.9,8979.9

## Keep-outs
Keep-Out Layer:
  lines w10: 2050,3050 8000,3050 8000,8950 2050,8950 2050,3050

## Other copper
Bottom Layer:
  text ".Hole_Count" at 7100,4275 h60
  text "Hole Count" at 7750,4275 h60
  text ".Via_Count" at 7050,4150 h60
  text "Via Count" at 7750,4150 h60
  text ".Print_Date" at 7050,4050 h60
  text "Date Built" at 7750,4050 h60
  text ".Print_Scale" at 7050,3950 h60
  text "Scale" at 7750,3950 h60
  text "Created by Levi Balling" at 4800,3750 h300
  text "HVAC and Garage" at 7825,3425 h400
  text "and Jen Balling" at 3975,3400 h300

## Silkscreen, mask and mechanical layers (free items; w line width, h text height)
Drill Drawing:
  text ".LEGEND" at 8200,3200 h60
  text "Drill Drawing." at 8200,3100 h60

## Dimensions
2050,3050 to 2050,8950 on Mechanical 1

## Text inside footprints (layer, text, board x,y; h text height)
J1: Top Overlay "6" at 7904.13,6708.27 h59.06 r270; Top Overlay "9" at 7904.13,6381.1 h59.06 r270; Top Overlay "5" at 7534.06,6326.57 h59.06 r270; Top Overlay "1" at 7534.06,6752.95 h59.06 r270